# EAGLE board Transmitter (EAGLE 6.4)

Size 160 x 100 mm. Coordinates in mm from the lower left corner, seen from the top.
Outline: 0,0 160,0 160,100 0,100 0,0
Copper layers (1*16): Top 0.035mm / dielectric 1.5mm / Bottom 0.035mm
Design rules "default": minimum track width 10mil, minimum drill 24mil, track to track 8mil, track to pad 8mil, pad to pad 8mil, via to via 8mil, smd to smd 8mil, copper to edge 40mil, drill to drill 8mil, minimum pad ring 10mil, minimum via ring 8mil, stop-mask expansion 4mil, vias tented up to drill 0mil, thermal gap 10mil

## Footprints (pad centres in the part's own frame; a part is rotated, then mirrored left to right if it is on the bottom)
C025-025X050 = drill 0.813 pad 1.676 octagon: 1 -1.27,0; 2 1.27,0
TO92 = drill 0.813 pad 1.676 octagon: 1 -1.27,0; 2 0,1.905; 3 1.27,0
POWER_JACK_PTH = drill 2.997 pad 4.318: GND 0,7.7; GNDBREAK 4.7,10.7; PWR 0,13.7
LED3MM = drill 0.813 pad 1.676 octagon: A -1.27,0; K 1.27,0
0309/10 = drill 0.813 octagon: 1 -5.08,0; 2 5.08,0
XBEE = drill 0.7 pad 1.422 square: 1 -11,5.5 | drill 0.7 pad 1.422: 2 -11,3.5; 3 -11,1.5; 4 -11,-0.5; 5 -11,-2.5; 6 -11,-4.5; 7 -11,-6.5; 8 -11,-8.5; 9 -11,-10.5; 10 -11,-12.5; 11 11,-12.5; 12 11,-10.5; 13 11,-8.5; 14 11,-6.5; 15 11,-4.5; 16 11,-2.5; 17 11,-0.5; 18 11,1.5; 19 11,3.5; 20 11,5.5
XBEE' = drill 0.8 pad 1.27: 1 -11,9; 2 -11,7; 3 -11,5; 4 -11,3; 5 -11,1; 6 -11,-1; 7 -11,-3; 8 -11,-5; 9 -11,-7; 10 -11,-9; 11 11,-9; 12 11,-7; 13 11,-5; 14 11,-3; 15 11,-1; 16 11,1; 17 11,3; 18 11,5; 19 11,7; 20 11,9

## Placement (x,y rotation side)
C1  [C025-025X050]  -59.05,-30.48 0 top  (outside the outline)
C2  [C025-025X050]  -59.05,-35.56 0 top  (outside the outline)
IC1  [TO92]  -47.62,-3.81 0 top  (outside the outline)
J1  POWER_JACKPTH  [POWER_JACK_PTH]  -57.78,-26.04 0 top  (outside the outline)
LED1  [LED3MM]  -47.62,-8.26 0 top  (outside the outline)
LED2  [LED3MM]  -59.69,-39.37 0 top  (outside the outline)
R1  [0309/10]  -43.81,-19.05 0 top  (outside the outline)
R2  [0309/10]  -55.88,-45.72 0 top  (outside the outline)
U$2  XBEE  [XBEE]  45.72,73.66 0 top
XB1  XBEE  [XBEE']  91.44,76.2 0 top

## Library data of the parts
C1 C2 IC1 LED1 LED2 U$2 = adafruit
J1 = SparkFun-Connectors
R1 R2 = rcl
XB1 = xbee; MPN: XBP24-Z7UIT-004; OC_FARNELL: 1751799; OC_NEWARK: 34R5507

## Nets
GND: XB1.10
VCC: XB1.1